# Altium PCB PCB1.PcbDoc
Units mil, origin at the board's own origin, x right, y up, seen from the top; angles counter-clockwise.
Board outline 6000 x 4000 mil, 2 copper layers (Top Layer, Bottom Layer); 14 components, 9 nets, 46 pads, 0 vias.
Unrouted connection lines stored in the file: 1.
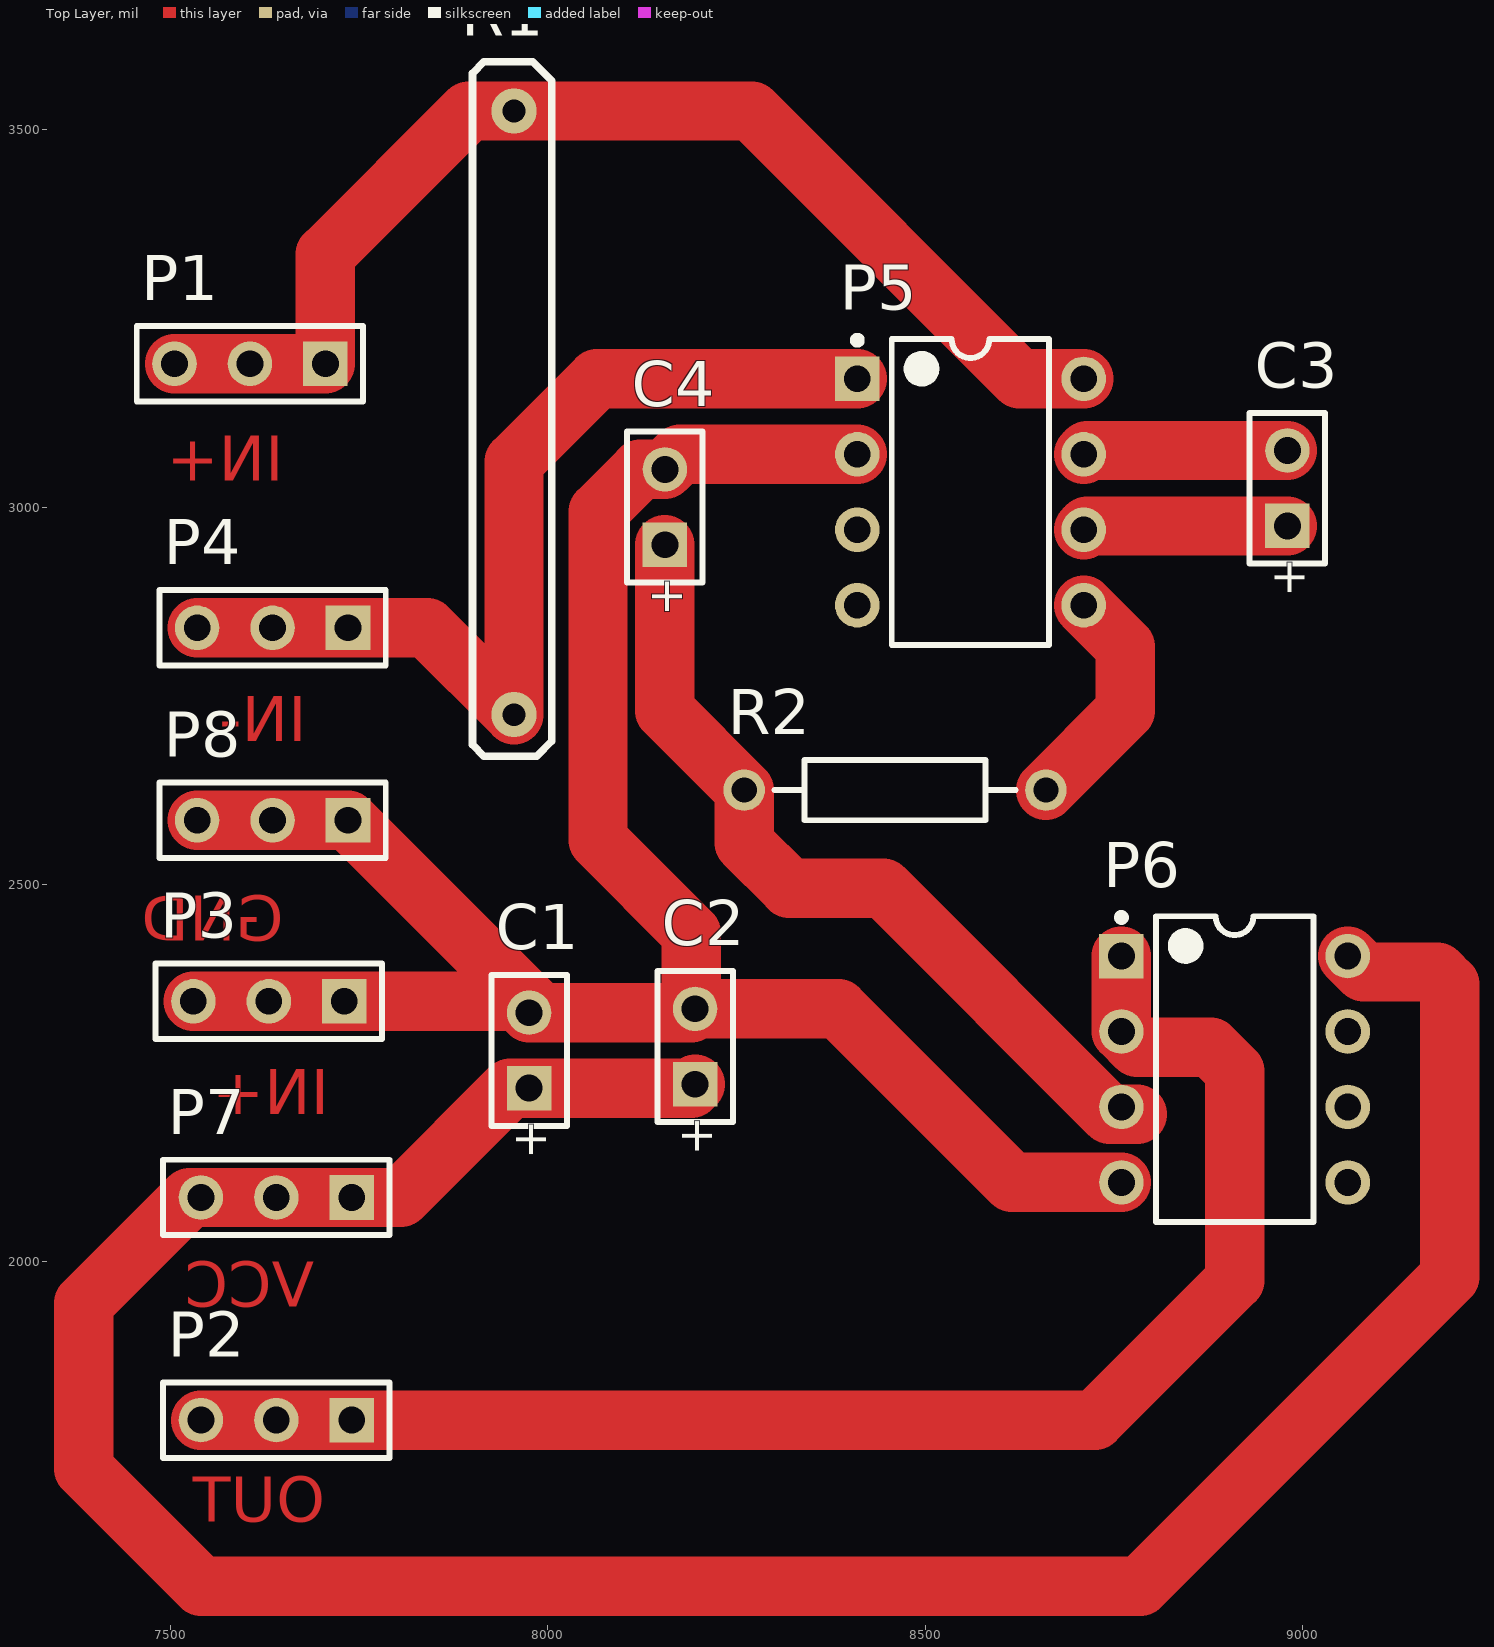
[diagram p0: Top Layer view]
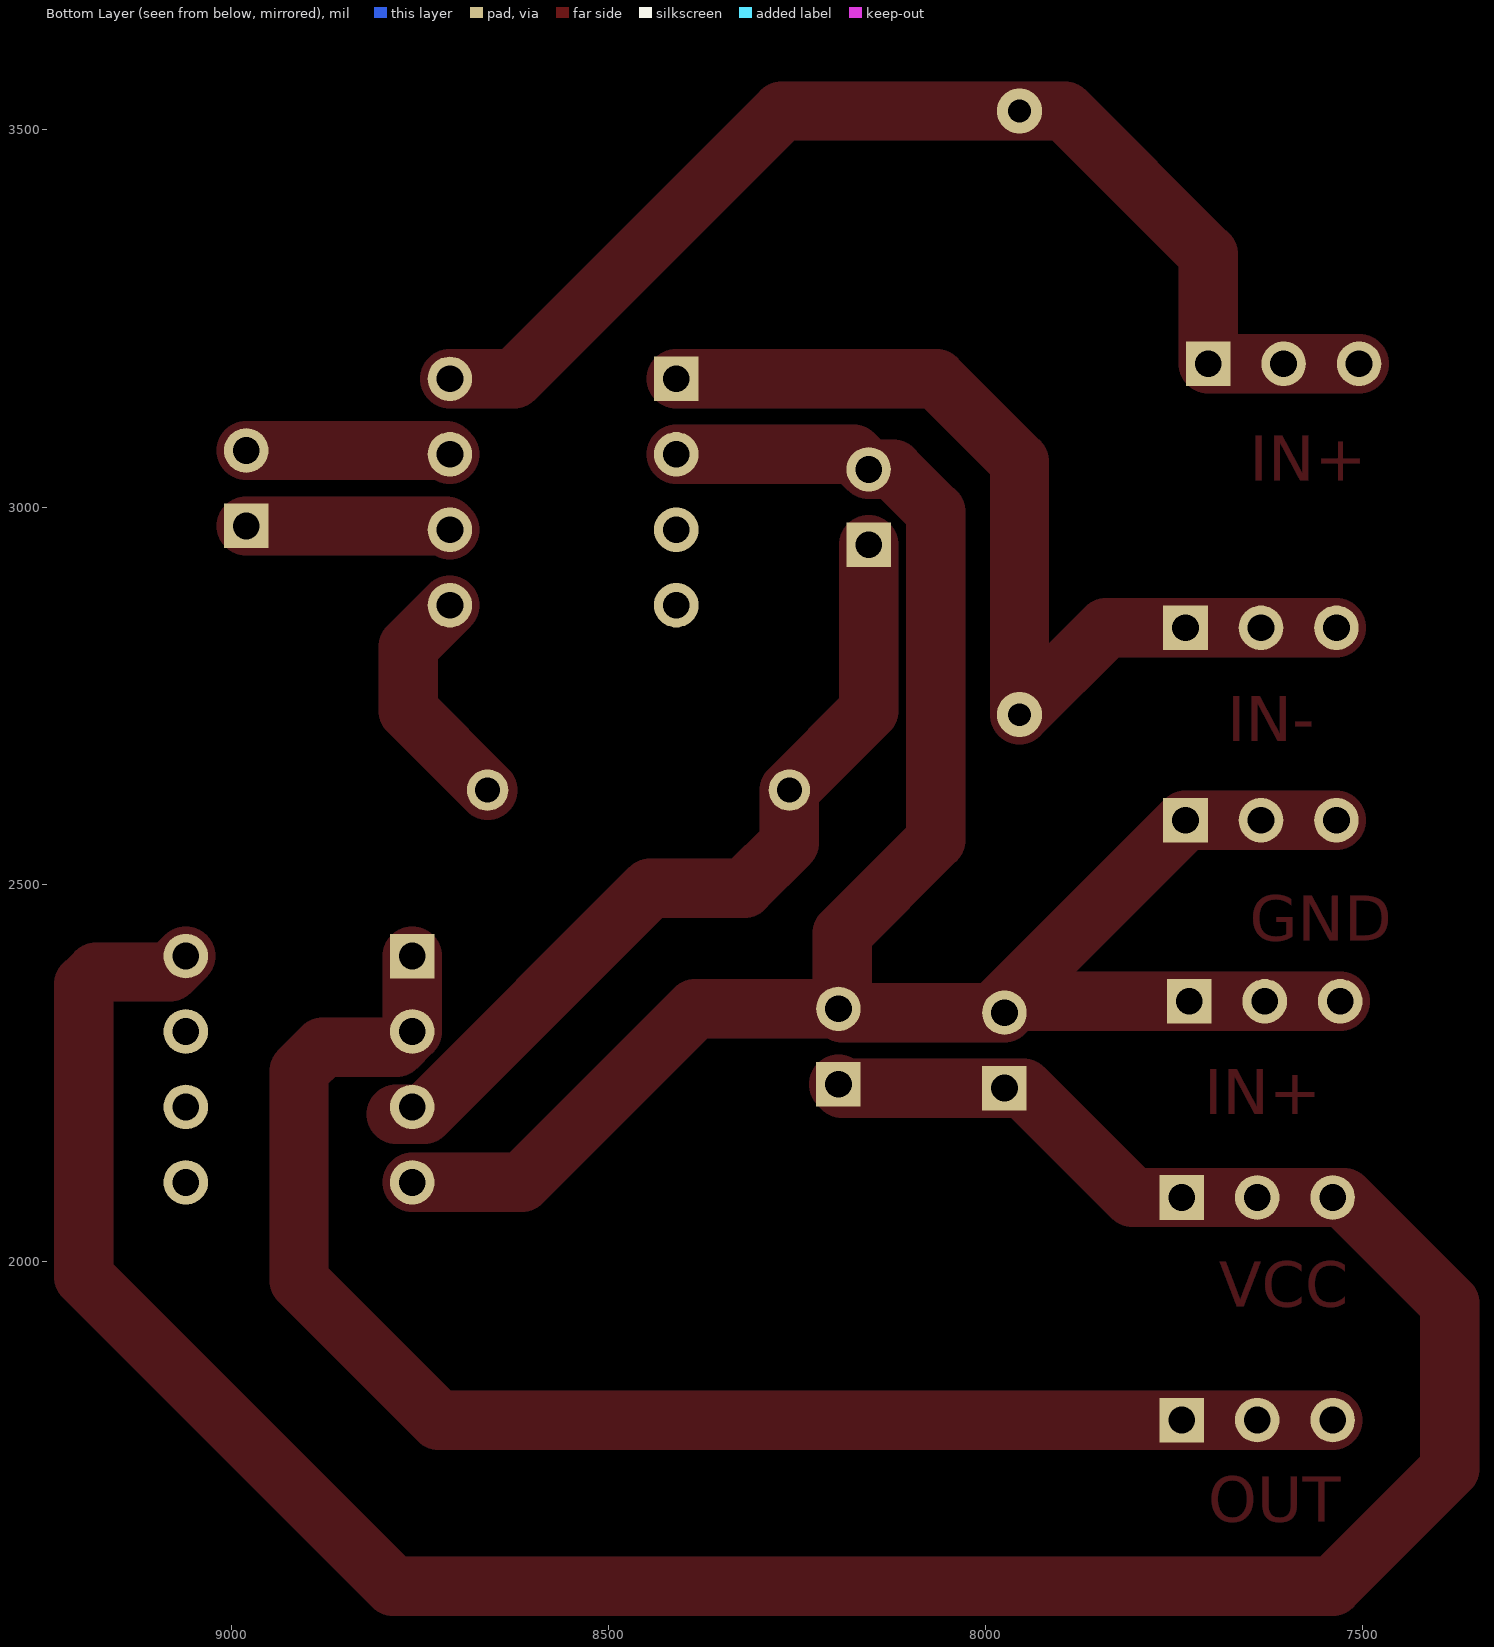
[diagram p1: Bottom Layer view, seen from below]

## Layer stack, top to bottom
Top Solder: solder mask 0.4, Solder Resist, Dk 3.5
Top Layer: signal copper 1.4
Dielectric 1: dielectric 12.6, FR-4, Dk 4.8
Bottom Layer: signal copper 1.4
Bottom Solder: solder mask 0.4, Solder Resist, Dk 3.5

## Board outline
1000,1000 7000,1000 7000,5000 1000,5000

## Design rules (kind name [scope] priority, off if disabled: settings)
Clearance [All] p1: gap=10 ignorepadtopadclearanceinfootprint=FALSE except(0: Arc-Hole Track-Hole SMDPad-Hole THPad-Hole Via-Hole Fill-Hole Poly-Hole Region-Hole Text-Hole)
PolygonConnect [All] p1: connectstyle=Relief reliefconductorwidth=10 reliefentries=4 polygonreliefangle="90 Angle" airgapwidth=10
RoutingVias [All] p1: holewidth=28 width=50 viastyle="Through Hole" minholewidth=28 minwidth=50 maxholewidth=28 maxwidth=50
SolderMaskExpansion [All] p1: expansion=4
Width [All] p1: maxlimit=78.74 minlimit=10 preferedwidth=10
30 further rules are at their usual default settings.

## Components (designator, comment, footprint, x,y, rotation, side; value= is the part's Value field where it differs from the comment)
C1 "Cap" BAT-2 7975,2280 r90 top value=104
C2 "Cap Pol3" BAT-2 8195,2285 r90 top value=10UF
C3 "Cap" BAT-2 8980,3025 r90 top value=100pF
C4 "Cap" BAT-2 8155,3000 r90 top value=103
P1 "Header 3" HDR1X3 7705,3190 r180 top
P2 "Header 3" HDR1X3 7740,1790 r180 top
P3 "Header 3" HDR1X3 7730,2345 r180 top
P4 "Header 3" HDR1X3 7735,2840 r180 top
P5 "INA282" DIP-8 8560,3020 r0 top
P6 "AD8552" DIP-8 8910,2255 r0 top
P7 "Header 3" HDR1X3 7740,2085 r180 top
P8 "Header 3" HDR1X3 7735,2585 r180 top
R1 "Res2" C 8027.5,1602.5 r90 top value=1K
R2 "Res2" AXIAL-0.4 8460,2625 r180 top value=100K

## Footprints (in the part's own frame and the unit in brackets; to place one, negate y for a bottom-side part, rotate by r counter-clockwise, add the part's x,y. Pads: shape width x height; smd on the part's side, far side on the other; paste and mask are expansions set on the pad)
AXIAL-0.4 [mm] "Axial Device, Thru-Hole; 2 Leads; 0.4 in Pin Spacing"
  round 1.4 hole 0.85: 1(-5.08,0) 2(5.08,0)
  silkscreen extent -4.06,-1.02 4.06,1.02
BAT-2 [mm] "Battery; 2 Leads"
  rect 1.5x1.5 hole 0.9: 1(-1.27,0)
  round 1.5 hole 0.9: 2(1.27,0)
  silkscreen extent -2.54,-1.27 2.54,1.27
C [mil]
  round 60 hole 30: 1(1122.5,72.5) 2(1922.5,72.5)
  silkscreen extent 1068,23 1988,128
DIP-8 [mm] "DIP; 8 Leads; Row Spacing 7.62 mm; Pitch 2.54 mm"
  rect 1.5x1.5 hole 0.9: 1(-3.81,3.81)
  round 1.5 hole 0.9: 2(-3.81,1.27) 3(-3.81,-1.27) 4(-3.81,-3.81) 5(3.81,-3.81) 6(3.81,-1.27) 7(3.81,1.27) 8(3.81,3.81)
  silkscreen extent -3.93,-5.15 2.65,5.23, body extent -3.6,-5.15 3.6,5.15, height 5.08
HDR1X3 [mm] "Connector; Header; 3 Position"
  rect 1.5x1.5 hole 0.9: 1(0,0)
  round 1.5 hole 0.9: 2(2.54,0) 3(5.08,0)
  silkscreen extent -1.27,-1.27 6.35,1.27

## Part data
C1 C3 C4: "Capacitor", LatestRevisionDate=17-Jul-2002, LatestRevisionNote="Re-released for DXP Platform.", PackageDescription="Radial Cap, Thru-Hole; 2 Leads; 0.3 in Pin Spacing", PackageReference=RAD-0.3, Published=8-Jun-2000, Publisher="Altium Limited"
C2: "Polarized Capacitor (Surface Mount)", LatestRevisionDate=29-May-2009, LatestRevisionNote="IPC-7351 Footprint Added.", PackageDescription="Chip Capacitor", PackageReference=C0805, Published=8-Jun-2000, Publisher="Altium Limited"
P1 P2 P3 P4 P7 P8: "Header, 3-Pin", LatestRevisionDate=17-Jul-2002, LatestRevisionNote="Re-released for DXP Platform.", Publisher="Altium Limited"
R1 R2: "Resistor", LatestRevisionDate=17-Jul-2002, LatestRevisionNote="Re-released for DXP Platform.", PackageDescription="Axial Device, Thru-Hole; 2 Leads; 0.4 in Pin Spacing", PackageReference=AXIAL-0.4, Published=8-Jun-2000, Publisher="Altium Limited"

## Nets (pads, with @x,y where several pads share a name; then routed paths per layer and width w, separated by ;. In a path a pad name is that pad's centre, name@x,y a point inside that pad or via, vN(x,y) a via of type N, cw(c..) or ccw(c..) an arc to the next point about the centre after c; other vN are vias at no path point)
GND: C1.2 C2.2 C4.2 P3.1 P3.2 P3.3 P5.2 P5.3 P6.4 P8.1 P8.2 P8.3 | length 2978.3
  Top Layer w78.74: P3.3 P3.2 P3.1 7960,2345 C1.2 ; P8.3 P8.2 P8.1 7975,2345 C1.2 ; P5.2 8175,3070 C4.2 8122.52,3050 8066.26,2993.74 8066.26,2558.74 8190,2435 C2.2@8190,2330 ; P6.4 8615,2105 8385,2335 C2.2 C2.2@8190,2330 ; C1.2 C2.2@8190,2330
NetC3_1: C3.1 P5.6 | length 272.1
  Top Layer w78.74: P5.6 8715,2975 C3.1
NetC3_2: C3.2 P5.7 | length 272.1
  Top Layer w78.74: P5.7 8715,3075 C3.2
NetC4_1: C4.1 P6.3 R2.2 | length 1108.6
  Top Layer w78.74: C4.1 8155,2730 R2.2 8260,2555 8320,2495 8444.5,2495 8744.34,2195.16 P6.3@8781.1,2195.16
NetP1_1: P1.1 P1.2 P1.3 P5.8 R1.2 | length 1575.7
  Top Layer w78.74: P1.3 P1.2 P1.1 7705,3335 7895,3525 R1.2 8270,3525 8625,3170 P5.8
NetP2_1: P2.1 P2.2 P2.3 P6.1 P6.2 | length 1995.8
  Top Layer w78.74: P2.3 P2.2 P2.1 8725,1790 8910,1975 8910,2252.44 8878.54,2283.9 8781.1,2283.9 P6.2 P6.1
NetP4_1: P4.1 P4.2 P4.3 P5.1 R1.1 | length 1303.2
  Top Layer w78.74: P4.3 P4.2 P4.1 7840,2840 R1.1 7955,3060 8065,3170 P5.1
NetP5_5: P5.5 R2.1 | length 311.3
  Top Layer w78.74: R2.1 8765,2730 8765,2815 P5.5
VCC: C1.1 C2.1 P6.8 P7.1 P7.2 P7.3 | length 3731.9
  Top Layer w78.74: C2.1 8190,2230 C1.1 7950,2230 7805,2085 P7.1 P7.2 P7.3 7525.25,2085 7385,1944.75 7385,1725.23 7540.23,1570 8785,1570 9195,1980 9195,2367.44 9178.54,2383.9 9081.1,2383.9 P6.8
pads on no net: P5.4 P6.5 P6.6 P6.7

## Other copper
Top Layer:
  text "IN+" at 7650,3035 h60
  text "IN-" at 7680,2690 h60
  text "GND" at 7650,2425 h60
  text "IN+" at 7710,2195 h60
  text "VCC" at 7690,1940 h60
  text "OUT" at 7705,1655 h60

## Text inside footprints (layer, text, board x,y; h text height)
C1: Top Overlay "+" at 7997.72,2135.51 h45.28 r90
C2: Top Overlay "+" at 8217.72,2140.51 h45.28 r90
C3: Top Overlay "+" at 9002.72,2880.51 h45.28 r90
C4: Top Overlay "+" at 8177.72,2855.51 h45.28 r90